# EAGLE board neck_v2 (EAGLE 6.6.0)
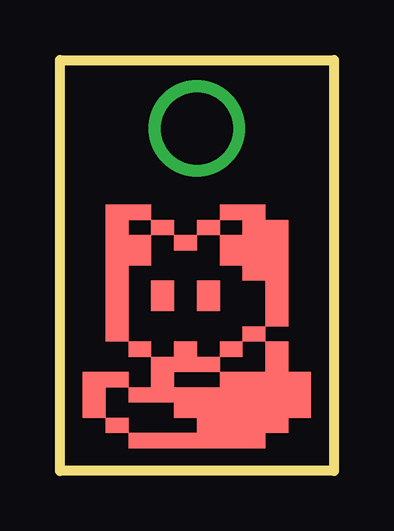
[diagram p0: board, top side]

Size 11.43 x 17.14 mm. Coordinates in mm from the lower left corner, seen from the top.
Outline: 0,0 0,17.14 11.43,17.14 11.43,0 0,0
Copper layers (1*16): Top 0.035mm / dielectric 1.5mm / Bottom 0.035mm
Design rules "default": minimum track width 10mil, minimum drill 24mil, track to track 8mil, track to pad 8mil, pad to pad 8mil, via to via 8mil, smd to smd 8mil, copper to edge 40mil, drill to drill 8mil, minimum pad ring 10mil, minimum via ring 8mil, stop-mask expansion 4mil, vias tented up to drill 0mil, thermal gap 10mil

## Footprints (pad centres in the part's own frame; a part is rotated, then mirrored left to right if it is on the bottom)
FOX = smd 0.953 x 0.635: P$1 0,0; P$2 0,-0.635; P$3 0.953,-0.635; P$4 -0.953,-0.635; P$5 -1.905,0; P$6 1.905,0; P$7 2.857,0.635; P$8 3.81,0; P$9 3.81,1.27; P$10 3.81,1.905; P$11 3.81,2.54; P$12 2.857,3.175; P$13 3.81,3.175; P$14 3.81,-0.635; P$15 1.905,-1.27; P$16 2.857,-1.27; P$17 3.81,-1.27; P$18 4.763,-1.27; P$19 4.763,-1.905; P$20 4.763,-2.54; P$21 3.81,-3.175; P$22 2.857,-3.81; P$23 -0.953,-1.27; P$24 -0.953,-1.905; P$25 -1.905,-1.905; P$26 -2.857,-1.27; P$27 -3.81,-1.27; P$28 -3.81,-1.905; P$29 -3.81,-2.54; P$30 -2.857,-3.175; P$31 -1.905,-3.81; P$32 -0.953,-3.81; P$33 0,-3.81; P$34 0.953,-3.81; P$35 1.905,-3.81; P$36 0,-1.905; P$37 0.953,-1.905; P$38 0,-2.54; P$39 0.953,-3.175; P$40 0.953,-2.54; P$41 1.905,-3.175; P$42 2.857,-3.175; P$43 2.857,-2.54; P$44 3.81,-2.54; P$45 3.81,-1.905; P$46 2.857,-1.905; P$47 1.905,-1.905; P$48 1.905,-2.54; P$49 -2.857,0.635; P$50 -2.857,1.27; P$51 -2.857,1.905; P$52 -2.857,2.54; P$53 -2.857,3.175; P$54 -1.905,3.81; P$55 -1.905,4.445; P$56 -2.857,4.445; P$57 -2.857,3.81; P$58 0,4.445; P$59 0.953,5.08; P$60 -0.953,5.08; P$61 1.905,4.445; P$62 1.905,3.81; P$63 0.953,2.54; P$64 -0.953,2.54; P$65 -0.953,1.905; P$66 0.953,1.905; P$67 1.905,5.715; P$68 2.857,5.715; P$69 2.857,5.08; P$70 3.81,5.08; P$71 3.81,4.445; P$72 3.81,3.81; P$73 2.857,4.445; P$74 2.857,3.81; P$75 -1.905,5.715; P$76 -2.857,5.715; P$77 -2.857,5.08

## Placement (x,y rotation side)
E$1  [FOX]  5.24,5.08 0 top

## Library data of the parts
E$1 = logo

## Tracks (layer width: path | path; a pad name or v marks a point on that pad's centre or on a via)
S$2  (via drill 3)
  other vias: 5.71,14.29